# EAGLE board IR-proximity-sensor (EAGLE 5.07)
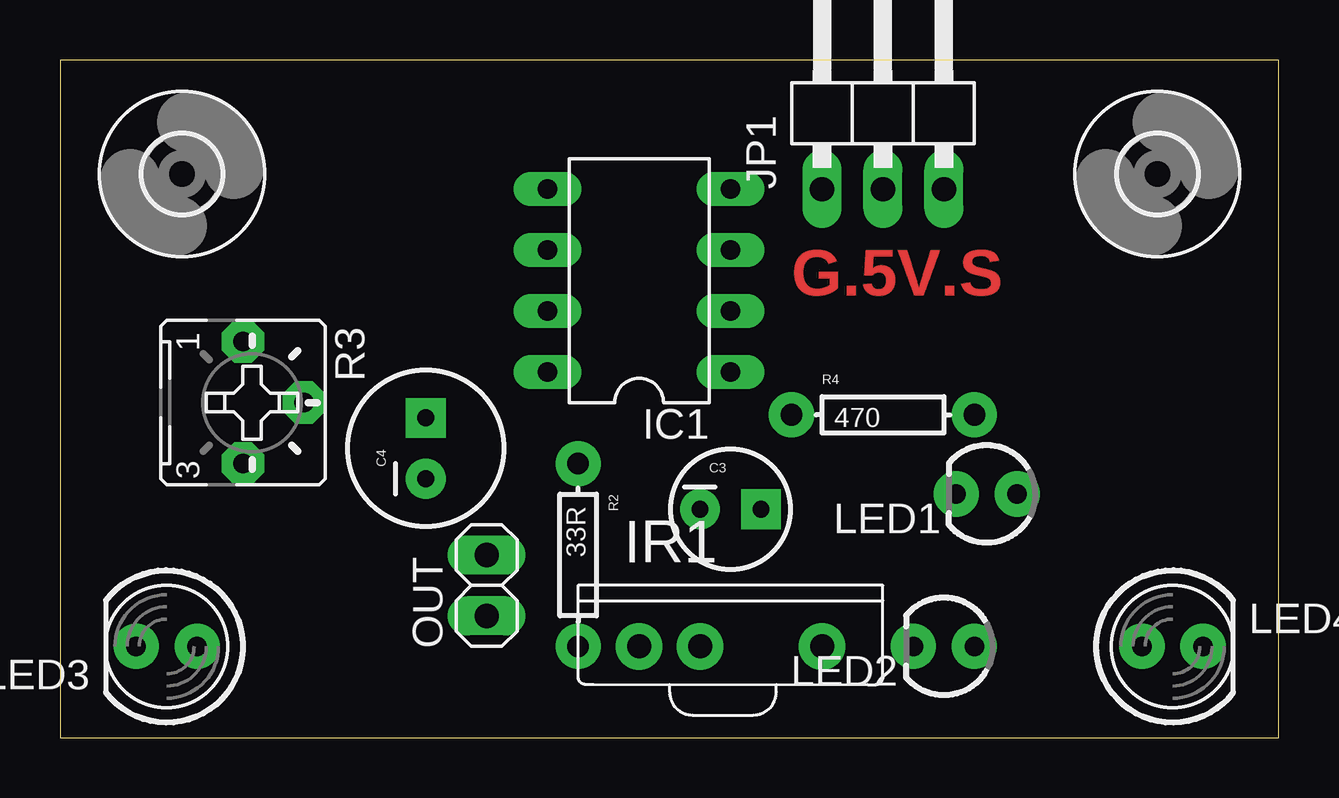
[diagram p0: board, top side]
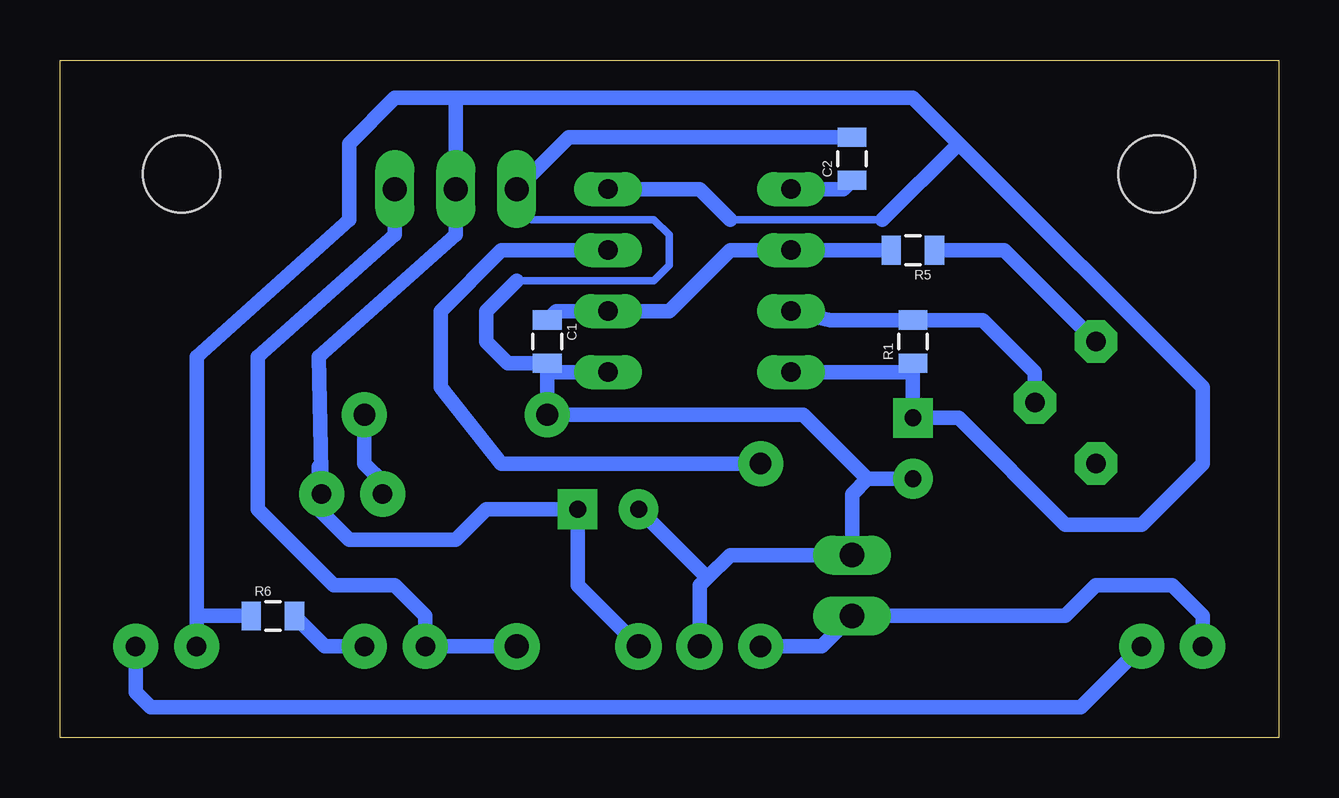
[diagram p1: board, bottom side, seen from below]

Size 50.78 x 28.25 mm. Coordinates in mm from the lower left corner, seen from the top.
Outline: 0,0 50.78,0 50.78,28.25 0,28.25 0,0
Copper layers (1*16): Top 0.035mm / dielectric 1.5mm / Bottom 0.035mm
Design rules "SparkFun-HP1007-600x600dpi": minimum track width 10mil, minimum drill 20mil, track to track 12mil, track to pad 12mil, pad to pad 12mil, via to via 12mil, smd to smd 12mil, copper to edge 12mil, drill to drill 12mil, minimum pad ring 12mil, minimum via ring 10mil, stop-mask expansion 4mil, vias tented up to drill 25mil, thermal gap 10mil

## Footprints (pad centres in the part's own frame; a part is rotated, then mirrored left to right if it is on the bottom)
0805 = smd 0.8 x 1.2: 1 -0.9,0; 2 0.9,0
CPOL-RADIAL-10UF-25V = drill 0.7 pad 1.651 square: 1 1.27,0 | drill 0.7 pad 1.651 round: 2 -1.27,0
CPOL-RADIAL-100UF-25V = drill 0.7 pad 1.651 square: 1 1.27,0 | drill 0.7 pad 1.651 round: 2 -1.27,0
3,2 = hole 3.2: 0,0
DIL-08 = drill 0.813 long: 1 -3.81,-3.81; 2 -1.27,-3.81; 3 1.27,-3.81; 4 3.81,-3.81; 5 3.81,3.81; 6 1.27,3.81; 7 -1.27,3.81; 8 -3.81,3.81
TSOP17_TB1_VERTICAL = drill 1 pad 1.93 round: GND -3.81,0; VO 3.81,0; VS -1.27,0
1X03/90 = drill 1.016 long: 1 -2.54,-3.81; 2 0,-3.81; 3 2.54,-3.81
LED3MM = drill 0.813 pad 1.88 round: A -1.27,0; K 1.27,0
LED5MM = drill 0.813 pad 1.88 round: A -1.27,0; K 1.27,0
1X02 = drill 1.016 long: 1 -1.27,0; 2 1.27,0
AXIAL-0.3 = drill 0.9 pad 1.88 round: P$1 -3.81,0; P$2 3.81,0
B25P = drill 0.813 pad 1.778 octagon: A -2.54,0; E 2.54,0; S 0,2.54

## Placement (x,y rotation side)
C1  102  [0805]  30.48,16.51 270 bottom
C2  103  [0805]  17.78,24.13 90 bottom
C3  47uF  [CPOL-RADIAL-10UF-25V]  27.94,9.53 0 top
C4  47uF  [CPOL-RADIAL-100UF-25V]  15.24,12.06 90 top
H1  MOUNT-HOLE3.2  [3,2]  5.08,23.5 0 top
H2  MOUNT-HOLE3.2  [3,2]  45.72,23.5 0 top
IC1  NE555  [DIL-08]  24.13,19.05 90 top
IR1  TSOP17TB1  [TSOP17_TB1_VERTICAL]  27.94,3.81 0 top
JP1  [1X03/90]  34.29,26.67 0 top
LED1  RED  [LED3MM]  38.61,10.16 180 top
LED2  Yellow  [LED3MM]  36.83,3.81 180 top
LED3  [LED5MM]  4.45,3.81 180 top
LED4  [LED5MM]  46.35,3.81 0 top
OUT  38khz  [1X02]  17.78,6.35 90 top
R1  27k(22k)  [0805]  15.24,16.51 90 bottom
R2  33R  [AXIAL-0.3]  21.59,7.62 270 top
R3  10k  [B25P]  7.62,13.97 270 top
R4  470  [AXIAL-0.3]  34.29,13.46 0 top
R5  3.9k(1.3k)  [0805]  15.24,20.32 180 bottom
R6  680R  [0805]  41.91,5.08 0 bottom

## Library data of the parts
C1-C4 LED2 R1 R2 R4-R6 = SparkFun
H1 H2 = holes
IC1 = st-microelectronics
IR1 LED1 LED3 LED4 R3 = digital-toy
JP1 OUT = pinhead

## Nets
5V: C3.1 C4.1 IC1.4 IC1.8 IR1.VS JP1.2 LED1.A LED4.A R1.1 R6.1
GND: C1.2 C2.2 C3.2 C4.2 IC1.1 IR1.GND JP1.1 OUT.2 R4.P$1
N$1: LED2.A R6.2
N$2: IC1.7 R1.2 R3.S
N$3: R3.A R5.1
N$4: LED1.K R4.P$2
N$5: LED3.K OUT.1 R2.P$2
N$6: C2.1 IC1.5
N$7: C1.1 IC1.2 IC1.6 R5.2
N$8: IC1.3 R2.P$1
N$9: IR1.VO JP1.3 LED2.K
N$10: LED3.A LED4.K

## Tracks (layer width: path | path; a pad name or v marks a point on that pad's centre or on a via)
5V
  Bottom 0.305: 16.51,21.59 22.86,21.59
  Bottom 0.61: 45.09,5.08 R6.1 | 45.09,5.08 LED4.A | IR1.VS 29.21,6.35 C3.1 33.02,9.53 34.29,8.26 38.73,8.26 40.01,9.53 40.01,10.03 LED1.A | 13.34,24.77 3.17,14.61 3.17,11.43 5.71,8.89 8.89,8.89 13.34,13.34 C4.1 R1.1 arc90 15.61,15.24 IC1.8 | 13.34,24.77 15.24,26.67 34.29,26.67 | IC1.4 24.13,22.86 22.86,21.59 | 13.34,24.77 16.51,21.59 | 34.29,26.67 JP1.2 34.29,20.95 40.01,15.88 LED1.A | 34.29,26.67 36.83,26.67 38.73,24.77 38.73,21.59 45.09,15.88 45.09,5.08 | LED1.A 40.01,11.3 40.01,10.16
GND
  Bottom 0.305: 31.75,19.05 26.04,19.05 25.4,19.68 25.4,20.95 26.04,21.59 31.11,21.59 31.75,22.23 JP1.1
  Bottom 0.61: IC1.1 30.11,15.24 C1.2 | C1.2 R4.P$1 19.81,13.46 17.14,10.79 | C1.2 32.12,15.61 33.02,16.51 33.02,17.78 31.75,19.05 | 17.14,10.79 17.78,10.16 OUT.2 22.86,7.62 23.81,6.67 | C4.2 17.14,10.79 | C2.2 29.58,25.03 JP1.1 | IR1.GND 24.13,6.35 23.81,6.67 | 23.81,6.67 C3.2
N$1
  Bottom 0.61: R6.2 39.74,3.81 LED2.A
N$2
  Bottom 0.61: IC1.7 18.68,17.41 R1.2 12.33,17.41 10.16,15.24 R3.S
N$3
  Bottom 0.61: R3.A 11.43,20.32 R5.1
N$4
  Bottom 0.61: LED1.K 37.34,10.67 38.1,11.43 R4.P$2
N$5
  Bottom 0.61: R2.P$2 19.05,3.81 OUT.1 8.89,5.08 7.62,6.35 4.45,6.35 3.17,5.08 LED3.K
N$6
  Bottom 0.61: IC1.5 18.15,22.86 C2.1
N$7
  Bottom 0.61: R5.2 IC1.6 22.86,20.32 25.4,17.78 IC1.2 30.11,17.78 C1.1
N$8
  Bottom 0.61: R2.P$1 32.38,11.43 34.92,14.61 34.92,17.78 32.38,20.32 IC1.3
N$9
  Bottom 0.61: IR1.VO LED2.K 35.56,5.08 36.83,6.35 39.37,6.35 42.55,9.53 42.55,15.88 36.83,20.95 JP1.3
N$10
  Bottom 0.61: LED3.A 8.26,1.27 46.99,1.27 47.62,1.91 LED4.K

## Text on the board
Top: G.5V.S